# Altium PCB SolarPanels.PcbDoc
Units mm, origin at the board's own origin, x right, y up, seen from the top; angles counter-clockwise.
Board outline 321.5 x 70 mm, 2 copper layers (Top Layer, Bottom Layer); 7 components, 7 nets, 31 pads, 16 vias.
Unrouted connection lines stored in the file: 3.
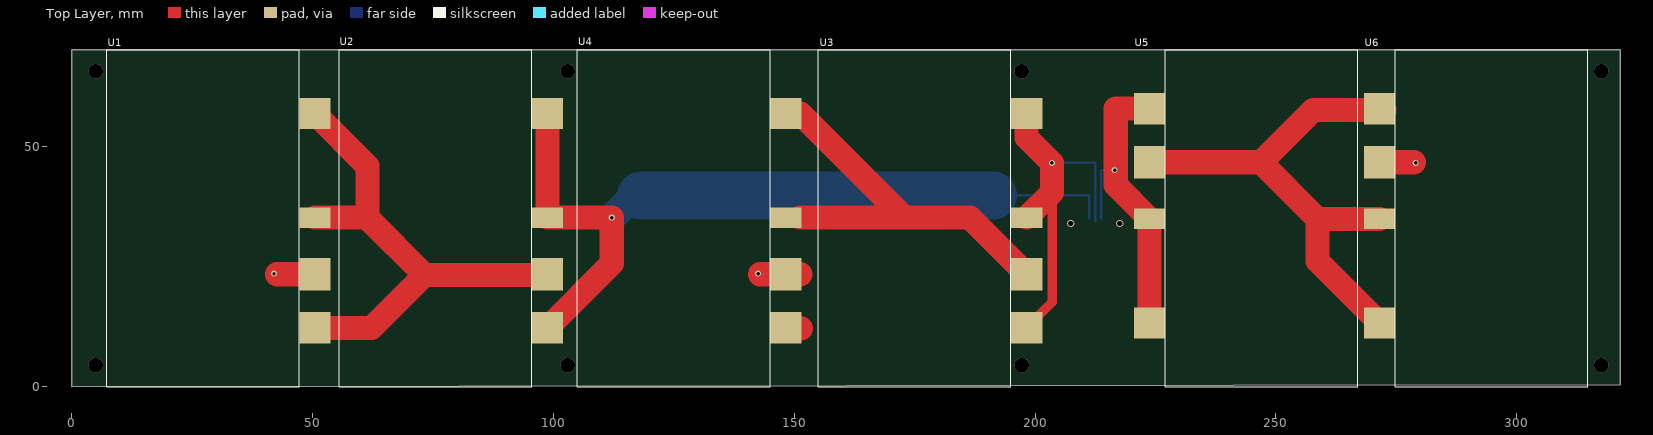
[diagram p0: Top Layer view]
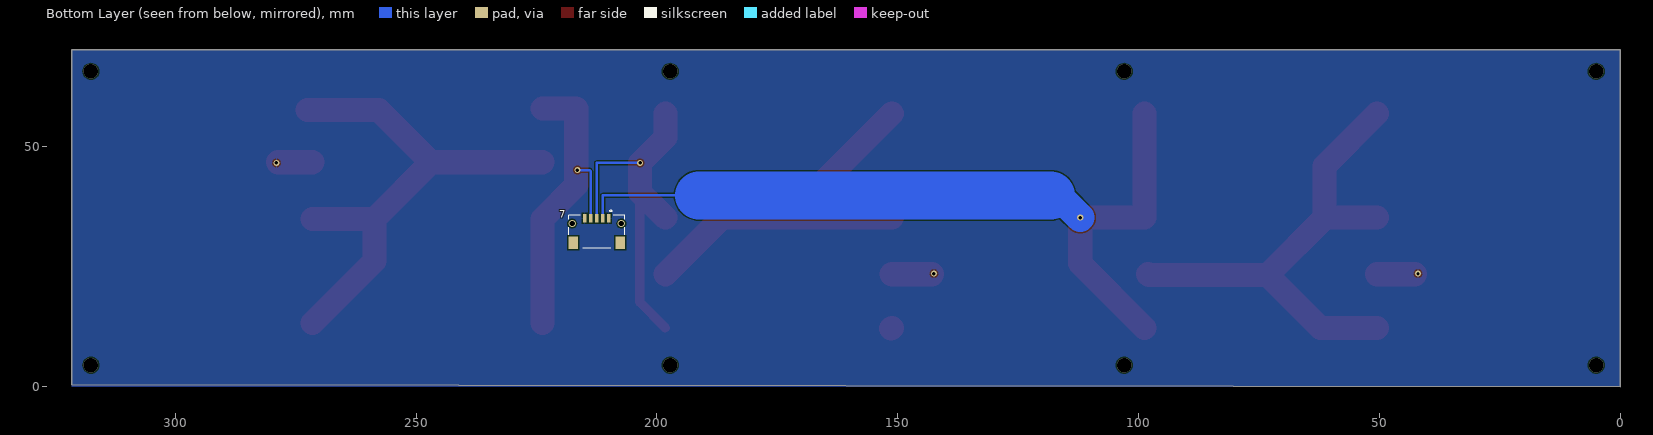
[diagram p1: Bottom Layer view, seen from below]

## Layer stack, top to bottom
Top Solder: solder mask 0.0102, Solder Resist, Dk 3.5
Top Layer: signal copper 0.0356
Dielectric 1: dielectric 0.32, FR-4, Dk 4.8
Bottom Layer: signal copper 0.0356
Bottom Solder: solder mask 0.0102, Solder Resist, Dk 3.5

## Board outline
0,0 0,70 321.5,70 321.5,0.487

## Design rules (kind name [scope] priority, off if disabled: settings)
Clearance [All] p1: gap=0.254 ignorepadtopadclearanceinfootprint=FALSE except(0: Arc-Hole Track-Hole SMDPad-Hole THPad-Hole Via-Hole Fill-Hole Poly-Hole Region-Hole Text-Hole)
PolygonConnect [All] p1: connectstyle=Relief reliefconductorwidth=0.254 reliefentries=4 polygonreliefangle="90 Angle" airgapwidth=0.254
RoutingVias [All] p1: holewidth=0.711 width=1.27 viastyle="Through Hole" minholewidth=0.711 minwidth=1.27 maxholewidth=0.711 maxwidth=1.27
SolderMaskExpansion [All] p1: expansion=0.102
Width [All] p1: maxlimit=10 minlimit=0.5 preferedwidth=5 minimp=50.000000 maximp=50.000000 favimp=50.000000
30 further rules are at their usual default settings.

## Components (designator, comment, footprint, x,y, rotation, side; value= is the part's Value field where it differs from the comment)
7 "DF14-5PinConnector" DF14-5P-1.25H(55) 212.5,35 r0 bottom
U1 "SolarPanel" SOLARPANEL 47.25,70 r180 top
U2 "SolarPanel" SOLARPANEL 95.5,70 r180 top
U3 "SolarPanel" SOLARPANEL 195,70 r180 top
U4 "SolarPanel" SOLARPANEL 145,70 r180 top
U5 "SolarPanel" SOLARPANEL 227,0 r0 top
U6 "SolarPanel" SOLARPANEL 274.75,0 r0 top

## Footprints (in the part's own frame and the unit in brackets; to place one, negate y for a bottom-side part, rotate by r counter-clockwise, add the part's x,y. Pads: shape width x height; smd on the part's side, far side on the other; paste and mask are expansions set on the pad)
DF14-5P-1.25H(55) [mm]
  rect 0.7x1.8 smd: 1(-2.5,0) 2(-1.25,0) 3(0,0) 4(1.25,0) 5(2.5,0)
  rect 2x2.6 smd: ""(-4.875,5.1) ""(4.875,5.1)
  silkscreen extent -5.81,-1.73 5.81,6.22
SOLARPANEL [mm]
  rect 6.5x6.5 smd: 1(-3.25,57.75) 4(-3.25,13.25)
  rect 6.5x6.75 smd: 2(-3.25,46.625)
  rect 6.5x4.25 smd: 3(-3.25,34.875)
  silkscreen extent 0,0 40,70

## Via types
v1: diameter 3, hole 3, Top Layer to Bottom Layer, 8 vias
v2: diameter 1.27, hole 0.711, Top Layer to Bottom Layer, 6 vias
v3: diameter 1.5, hole 1.1, Top Layer to Bottom Layer, 2 vias

## Nets (pads, with @x,y where several pads share a name; then routed paths per layer and width w, separated by ;. In a path a pad name is that pad's centre, name@x,y a point inside that pad or via, vN(x,y) a via of type N, cw(c..) or ccw(c..) an arc to the next point about the centre after c; other vN are vias at no path point)
GND: 7.1 7.5 U1.2 U4.2 U6.2 | length 23.4
  Top Layer w5: 42.625,23.375 U1.2 ; v2@142.875,23.375 U4.2@151.25,23.375 ; U6.2 v2@278.625,46.625
  other v2: 42,23.5 142.5,23.5 279,46.5
NetU1_1: U1.1 U1.3 U1.4 U2.2 | length 105.9
  Top Layer w5: U1.1 62.25,12.25 73.25,23.25 ; U1.3 61.375,35.125 ; U1.4 61.375,45.875 61.375,35.125 ; U2.2@98,23.375 97.875,23.25 73.25,23.25 ; 61.375,35.125 73.25,23.25
NetU3_2: U3.2 U4.1 U4.3 U4.4 | length 82.6
  Top Layer w5: U4.1@151.25,12.25 U4.1@151.375,12.125 ; U4.3@151.25,35.125 172.875,35.125 ; U4.4@151.25,56.75 172.875,35.125 ; U3.2 186.5,35.125 172.875,35.125
NetU5_2: U5.2 U6.1 U6.3 U6.4 | length 109.7
  Top Layer w5: U5.2 246.875,46.625 ; U6.4 258.625,26.125 258.625,34.875 ; U6.3 258.625,34.875 ; U6.1@272.5,57.5 257.75,57.5 246.875,46.625 ; 246.875,46.625 258.625,34.875
SolarPanelPair1: 7.2 U2.1 U2.3 U2.4 | length 169.2
  Top Layer w5: U2.1 112.125,25.625 v2(112.125,35.125) U2.3 U2.4
  Bottom Layer w0.5: 191.25,39.75 211.25,39.75 7.2
  Bottom Layer w5: 116.75,39.75 118.25,39.75
  Bottom Layer w6: v2(112.125,35.125) 116.75,39.75
  Bottom Layer w10: 118.25,39.75 191.25,39.75
SolarPanelPair2: 7.3 U3.1 U3.3 U3.4 | length 77.4
  Top Layer w2: U3.1 203.563,17.562 203.563,40.437
  Top Layer w5: U3.3 203.5,40.375 v2(203.5,46.5) 198.25,51.75 U3.4
  Bottom Layer w0.5: v2(203.5,46.5) 212.5,46.5 7.3 7.3@212.5,34.5
  other v3: 207.4,33.9
SolarPanelPair3: 7.4 U5.1 U5.3 U5.4 | length 67
  Top Layer w5: U5.4 U5.3 216.75,41.875 216.75,57.75 U5.1
  Bottom Layer w0.5: 7.4 213.75,44.75 214,45 v2(216.5,45)
  other v3: 217.6,33.9
pads on no net: 7.
copper on no net:
  other v1: 5,4.5 103,4.5 197.25,4.5 317.5,4.5 5,65.5 103,65.5 197.25,65.5 317.5,65.5

## Polygon pours and split planes (outlines as drawn)
no net on Top Layer "Top Layer-No Net 1" (solid, pour order 0): 0,0
GND on Bottom Layer "Ground Pour" (solid, pour order 2): 0,0 0,70 321.5,70 321.5,0